# Altium PCB 15336-ROM3_tablet_RJ12.PcbDoc (part 2 of 2)
Units mil, origin at the board's own origin, x right, y up, seen from the top; angles counter-clockwise.
Board outline 3125 x 1750 mil, 4 copper layers (Top Layer, Ground, Inner, Bottom Layer), stack 61.434 mil thick; 35 components, 22 nets, 97 pads, 187 vias.
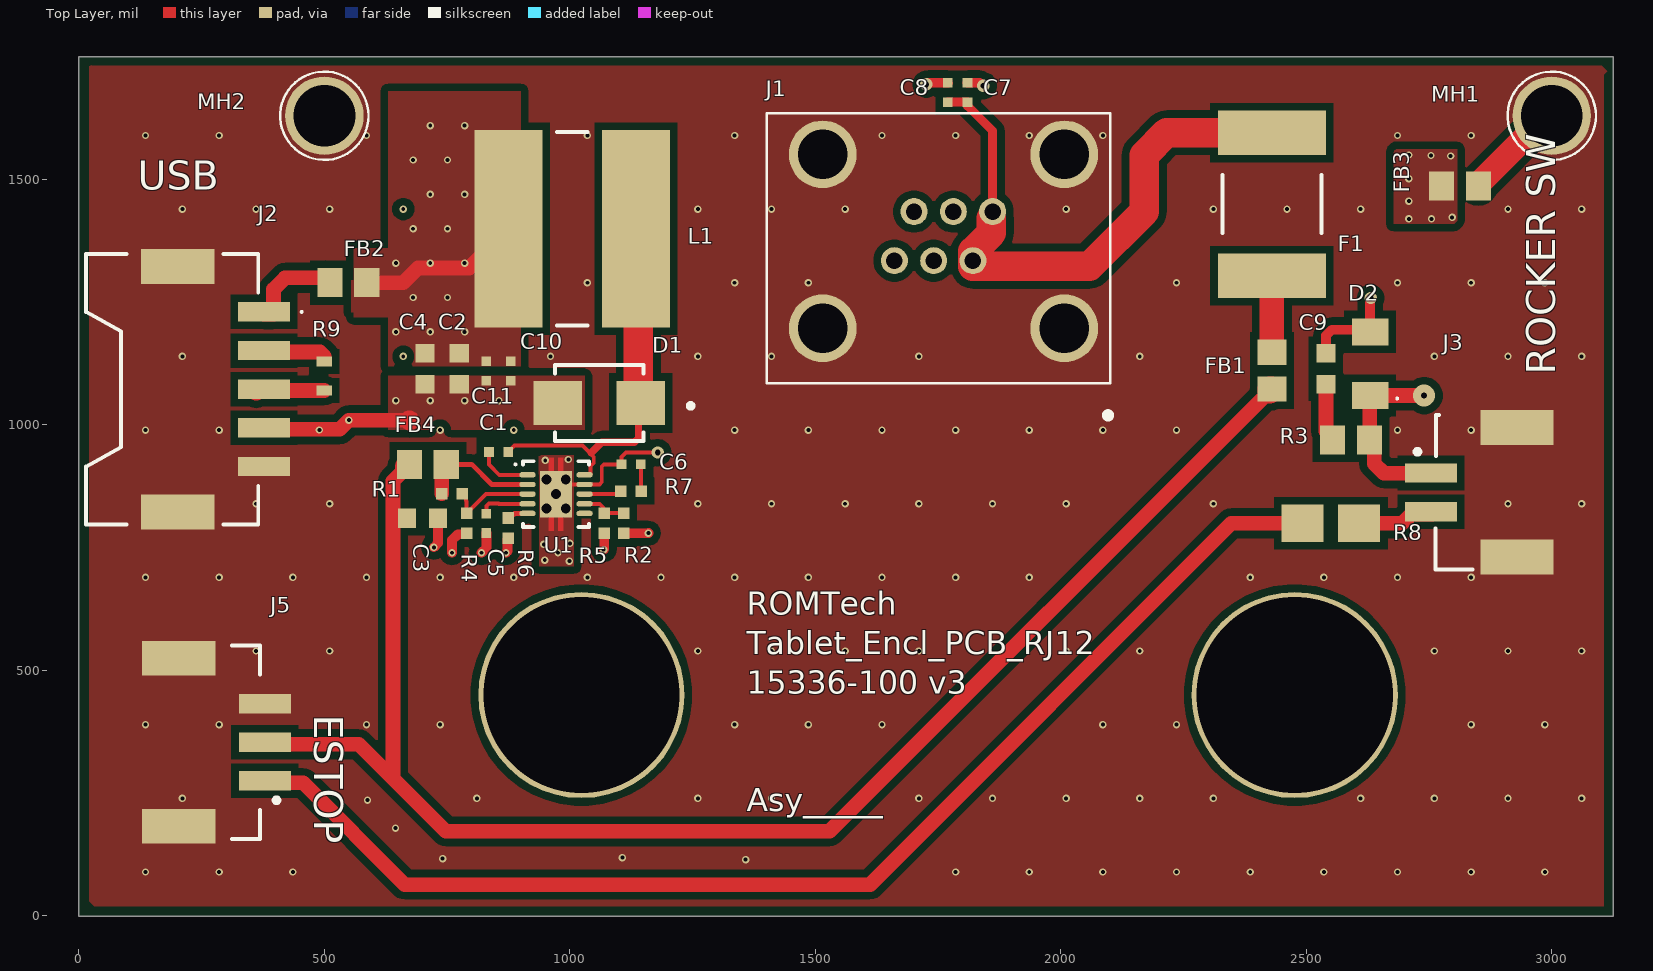
[diagram p0: Top Layer view]

## Via types
v1: diameter 15, hole 8, Top Layer to Bottom Layer, 177 vias
v2: diameter 20, hole 20, Top Layer to Bottom Layer, 5 vias
v3: diameter 25, hole 12, Top Layer to Bottom Layer, 4 vias
v4: diameter 45, hole 12, Top Layer to Bottom Layer, 1 vias

## Nets (pads, with @x,y where several pads share a name; then routed paths per layer and width w, separated by ;. In a path a pad name is that pad's centre, name@x,y a point inside that pad or via, vN(x,y) a via of type N, cw(c..) or ccw(c..) an arc to the next point about the centre after c; other vN are vias at no path point) (continued)
A_GND: (continued)
  other v1: 135.71,89.36 285.71,89.36 435.71,89.36 1785.71,89.36 1935.71,89.36 2085.71,89.36 2235.71,89.36 2385.71,89.36 2535.71,89.36 2685.71,89.36 2835.71,89.36 2985.71,89.36 1357.94,114.54 740.94,116.54 1106.94,118.54 644.94,178.54 587.94,235.54 210.71,239.36 810.71,239.36 1260.71,239.36 1410.71,239.36 1710.71,239.36 1860.71,239.36 2010.71,239.36 2160.71,239.36 2310.71,239.36 2610.71,239.36 2760.71,239.36 2910.71,239.36 3060.71,239.36 135.71,389.36 285.71,389.36 585.71,389.36 735.71,389.36 1335.71,389.36 1485.71,389.36 1635.71,389.36 2085.71,389.36 2235.71,389.36 2835.71,389.36 2985.71,389.36 360.71,539.36 510.71,539.36 1260.71,539.36 1410.71,539.36 1560.71,539.36 1710.71,539.36 2010.71,539.36 2160.71,539.36 2760.71,539.36 2910.71,539.36 3060.71,539.36 135.71,689.36 285.71,689.36 435.71,689.36 585.71,689.36 735.71,689.36 885.71,689.36 1035.71,689.36 1185.71,689.36 1335.71,689.36 1485.71,689.36 1635.71,689.36 1785.71,689.36 1935.71,689.36 2385.71,689.36 2535.71,689.36 2685.71,689.36 2835.71,689.36 360.71,839.36 510.71,839.36 1260.71,839.36 1410.71,839.36 1560.71,839.36 1710.71,839.36 1860.71,839.36 2010.71,839.36 2310.71,839.36 2910.71,839.36 3060.71,839.36 135.71,989.36 285.71,989.36 735.71,989.36 885.71,989.36 1335.71,989.36 1485.71,989.36 1635.71,989.36 1785.71,989.36 1935.71,989.36 2085.71,989.36 2235.71,989.36 2685.71,989.36 2835.71,989.36 210.71,1139.36 660.71,1139.36 960.71,1139.36 1260.71,1139.36 1410.71,1139.36 1710.71,1139.36 2160.71,1139.36 2760.71,1139.36 2910.71,1139.36 3060.71,1139.36 1035.71,1289.36 1335.71,1289.36 1485.71,1289.36 2235.71,1289.36 2685.71,1289.36 2835.71,1289.36 2985.71,1289.36 210.71,1439.36 360.71,1439.36 510.71,1439.36 660.71,1439.36 1260.71,1439.36 1410.71,1439.36 1560.71,1439.36 2010.71,1439.36 2310.71,1439.36 2460.71,1439.36 2610.71,1439.36 2910.71,1439.36 3060.71,1439.36 135.71,1589.36 285.71,1589.36 585.71,1589.36 1035.71,1589.36 1335.71,1589.36 1635.71,1589.36 1785.71,1589.36 1935.71,1589.36 2085.71,1589.36 2685.71,1589.36 2835.71,1589.36
GND: C2.1 C3.1 C4.1 C5.1 C6.1 C7.2 C8.1 C9.2 C10.2 C11.1 D1.1 D2.1 FB3.2 J1.3 J1.5 J1.6 J2.4 R4.1 R5.2 R6.1 U1.9 U1.11 | length 1105.8
  Top Layer w8: v2(971.87,858.91) 991.55,878.59 1060.25,878.59 1064.94,883.28 1064.94,914.85 1069.62,919.54 C6.1 1105.25,934.85 1113.94,943.54 v3(1178.94,943.54)
  Top Layer w20: v1(722.94,750.54) 731.43,759.03 C3.1 ; v1(759.94,739.54) 759.94,765.34 771.65,777.06 788.13,777.06 R4.1 ; v1(819.94,739.54) 829.94,749.54 C5.1 ; v1(869.94,739.54) 873.13,742.73 873.13,767.06 R6.1 ; v1(1068.94,745.54) 1069.94,746.54 R5.2 ; v3(1725.94,1693.54) 1727.29,1693.54 1730.44,1696.69 C7.2 ; C8.1 1834.44,1696.68 1840.58,1690.54 v3(1841.94,1690.54) ; C9.2 2539.94,1181.82 2551.65,1193.54 2625.9,1193.54 D2.1 2629.94,1257.54 v3(2630.94,1258.54)
  Top Layer w30: J2.4@361.04,990.8 531.2,990.8 v1(549.94,1009.54) 672.94,1009.54
  Top Layer w40: 672.94,1009.54 673.94,1008.54
  other v1: 998.94,722.54 948.94,724.54 975.94,739.54 946.94,756.54 999.94,758.54 949.94,927.54 996.94,929.54 489.94,989.54 645.71,1049.36 715.71,1049.36 785.71,1049.36 855.71,1049.36 2708.94,1419.54 2754.94,1419.54 2796.94,1422.54 2708.94,1455.54 2708.94,1501.54 2793.94,1547.54 2753.94,1548.54 2708.94,1549.54
  other v2: 952.18,829.38 991.55,829.38 952.18,888.43 991.55,888.43
NetC1_1: C1.1 D1.2 L1.1 U1.10 | length 781.4
  Top Layer w8: C1.1 887.62,957.54 1025.94,957.54 1043.78,939.69 1048.62,934.85 1048.62,922.56 1041.74,915.67 1041.74,899.67 1040.34,898.28 U1.10
  Top Layer w15: 1043.78,943.38 1064.94,964.54 1131.15,964.54 1139.94,973.32 1139.94,1044.89 D1.2@1142.08,1047.04
  Top Layer w60: L1.1 1139.72,1394.67 1139.72,1049.4 1142.08,1047.04 D1.2
NetC1_2: C1.2 U1.1 | length 112.5
  Top Layer w8: C1.2 835.25,919.22 856.2,898.28 U1.1
NetC5_2: C5.2 U1.4 | length 101.4
  Top Layer w8: C5.2 829.94,834.54 834.94,839.54 854.94,839.54 855.25,839.22 U1.4
NetC6_2: C6.2 R7.2 | length 55.4
  Top Layer w8: C6.2 1145.11,919.04 R7.2 R7.2@1145.61,864.54
NetC9_1: C9.1 R3.1 | length 119.6
  Top Layer w30: C9.1 2539.94,987.07 2553.54,973.47 R3.1 R3.1@2553.24,969.84
NetF1_1: F1.1 FB1.2 | length 155.9
  Top Layer w50: FB1.2 F1.1
NetFB2_2: FB2.2 J2.1 | length 196.6
  Top Layer w30: J2.1@396.51,1230.33 396.51,1276.1 419.94,1299.54 FB2.2@501.54,1299.54
  Top Layer w40: J2.1 396.19,1230.02 J2.1@396.51,1230.33 ; FB2.2@501.54,1299.54 502.01,1299.06 505.94,1299.06 511.54,1293.47 FB2.2
NetFB4_2: FB4.2 R1.2 U1.2 | length 246.2
  Top Layer w10: FB4.2 799.94,919.54 840.88,878.59 U1.2
  Top Layer w30: R1.2 739.27,910.47 FB4.2
NetJ2_2: J2.2 R9.1 | length 142.5
  Top Layer w30: J2.2@361.04,1148.28 491.2,1148.28 499.94,1139.54
NetJ2_3: J2.3 R9.2 | length 138.9
  Top Layer w30: J2.3@361.35,1069.85 474.19,1069.85 ; 474.35,1070.01 R9.2
  Top Layer w40: J2.3@361.04,1069.54 J2.3@361.35,1069.85
NetJ3_2: J3.2 R8.1 | length 165.7
  Top Layer w30: R8.1 2695.33,799.54 2714.28,818.48 2756.73,818.48 J3.2@2762.78,824.54
NetJ5_1: J5.1 R8.2 | length 2518.2
  Top Layer w30: J5.1@364.98,270.8 456.68,270.8 663.94,63.54 1611.26,63.54 2347.26,799.54 R8.2
NetR1_1: R1.1 R4.2 U1.3 | length 183.2
  Top Layer w8: R1.1 788.42,851.72 788.42,845.54 789.94,844.02 R4.2@789.94,827.17 ; R4.2@786.9,827.17 R4.2@789.94,827.17 ; R4.2 R4.2@789.94,827.17 ; U1.3 829.31,858.91 797.57,827.17 R4.2@789.94,827.17
NetR2_2: R2.2 R5.1 U1.7 | length 97.1
  Top Layer w8: U1.7 1060.25,839.22 1074.94,824.54 1074.94,824.22 R5.1@1078.95,820.21 ; R5.1 R5.1@1078.95,820.21 ; R2.2 R5.1@1078.95,820.21
NetR6_2: R6.2 U1.5 | length 42.4
  Top Layer w10: R6.2 881.75,817.02 885.28,817.02 887.61,819.34 U1.5@913.6,819.34
NetR7_1: R7.1 U1.8 | length 76.7
  Top Layer w8: U1.8 1030.52,859.48 1099.22,859.48 R7.1@1104.27,864.54
PS_ON: D2.2 J1.4 J3.1 R3.2 | length 1655.6
  Top Layer w30: v4(2739.94,1059.54) D2.2 2629.14,1058.78 2629.14,970.34 R3.2 2638.52,959.36 2638.52,920.96 2658.14,901.33 2762.97,901.33 J3.1@2763.54,901.91
  Inner w30: J1.4@1741,1323 1741,1166.11 1758.57,1148.54 1865.94,1148.54 1948.94,1065.54 2151.94,1065.54 2234.94,1148.54 2650.94,1148.54 v4(2739.94,1059.54)
pads on no net: U1.6

## Polygon pours and split planes (outlines as drawn)
A_GND on Top Layer "A_GND_L01_P046" (solid, pour order 46): 20.94,1734.54 20.94,29.54 30.94,19.54 3105.94,19.54 3105.94,1713.54 3112.94,1720.54 3101.94,1731.54 27.94,1731.54
GND on Top Layer "GND_L01_P045" (solid, pour order 45): 2677.94,1559.54 2677.94,1409.54 2800.94,1409.54 2806.94,1415.54 2806.94,1561.54 2681.94,1561.54 2678.94,1558.54
GND on Top Layer "GND_L01_P042" (solid, pour order 42): 936.94,936.54 937.94,935.54 937.94,711.54 1007.94,711.54 1007.94,944.54 944.94,944.54
GND on Top Layer "GND_L01_P041" (solid, pour order 41): 936.94,899.54 938.94,897.54 938.94,784.1 1006.94,784.1 1006.94,932.54 1002.94,936.54 936.94,936.54 936.94,898.54
5V on Top Layer "5V_L01_P021" (solid, pour order 21): 629.94,1679.54 629.94,1359.54 559.94,1359.54 559.94,1219.54 629.94,1219.54 629.94,1119.54 899.94,1119.54 899.94,1679.54
GND on Top Layer "GND_L01_P020" (solid, pour order 20): 629.94,989.54 1029.94,989.54 1029.94,1099.54 629.94,1099.54 1029.94,1099.54 629.94,1099.54
5V on Top Layer "5V_L01_P011" (solid, pour order 11): 554.94,1294.54 554.94,1229.54 684.94,1229.54 684.94,1224.54 689.94,1219.54 789.94,1219.54 789.94,1294.54
5V on Inner "5V_L03_P016" (solid, pour order 16): 649.94,1699.54 649.94,1229.54 979.94,1229.54 1089.94,1119.54 1089.94,749.54 1279.94,749.54 1299.94,769.54 1299.94,1699.54
GND on Inner "GND_L03_P039" (solid, pour order 39): 523.94,1046.54 524.94,1046.54 1055.94,1046.54 1055.94,645.54 523.94,645.54
GND on Inner "GND_L03_P034" (solid, pour order 34): 496.94,850.54 498.94,848.54 724.94,848.54 724.94,507.54 722.94,509.54 492.94,509.54 492.94,848.54
GND on Inner "GND_L03_P019" (solid, pour order 19): 29.17,1731.21 579.17,1731.21 599.17,1711.21 599.17,1511.21 539.17,1511.21 539.17,1471.21 539.17,1411.21 539.17,651.21 629.17,651.21 639.17,661.21 1389.17,661.21 1419.17,691.21 1419.17,1721.21 3109.17,1721.21 3109.17,31.21 19.17,31.21 29.17,41.21 29.17,1741.21
5V on Inner "5V_L03_P018" (solid, pour order 18): 629.94,1449.54 629.94,1129.54 899.94,1129.54 899.94,1449.54
A_GND on Bottom Layer "A_GND_L04_P025" (solid, pour order 25): 19.94,1739.54 3099.94,1739.54 3099.94,24.54 24.94,24.54 24.94,1734.54
A_GND on Bottom Layer "A_GND_L04_P003" (solid, pour order 3): 24.94,1719.54 24.94,24.54 3099.94,24.54 3099.94,1724.54 3094.94,1719.54
GND on Ground "GND_L02_P005" (solid, pour order 5): 27.44,1722.02 27.44,22.02 3102.44,22.02 3102.44,1722.02

## Silkscreen, mask and mechanical layers (free items; w line width, h text height)
Top Overlay:
  lines w1: 1400.94,1085.54 1401.94,1085.54
  text "USB" at 119.94,1459.54 h100
  text "ROCKER SW" at 3025.94,1101.54 h100 r90
  text "ESTOP" at 459.94,409.54 h100 r270
  text "ROMTech / Tablet_Encl_PCB_RJ12 / 15336-100 v3 /  /  / Asy_____" at 1359.94,197.54 h80
Bottom Overlay:
  text "ROMTech / Tablet_Encl_RJ12_PCB / 15336-100 v3 /  /  / Asy_____" at 1386.94,197.54 h80
Mechanical 1:
  drawing of 1252 lines, arcs and shapes, not listed
Board Outline:
  lines w5: -0.06,-0.46 3124.94,-0.46 3124.94,1749.54 -0.06,1749.54 -0.06,-0.46